# Altium PCB PCB1.PcbDoc
Units mm, origin at the board's own origin, x right, y up, seen from the top; angles counter-clockwise.
Board outline 152.4 x 101.6 mm, 2 copper layers (Top Layer, Bottom Layer); 13 components, 14 nets, 36 pads, 0 vias.
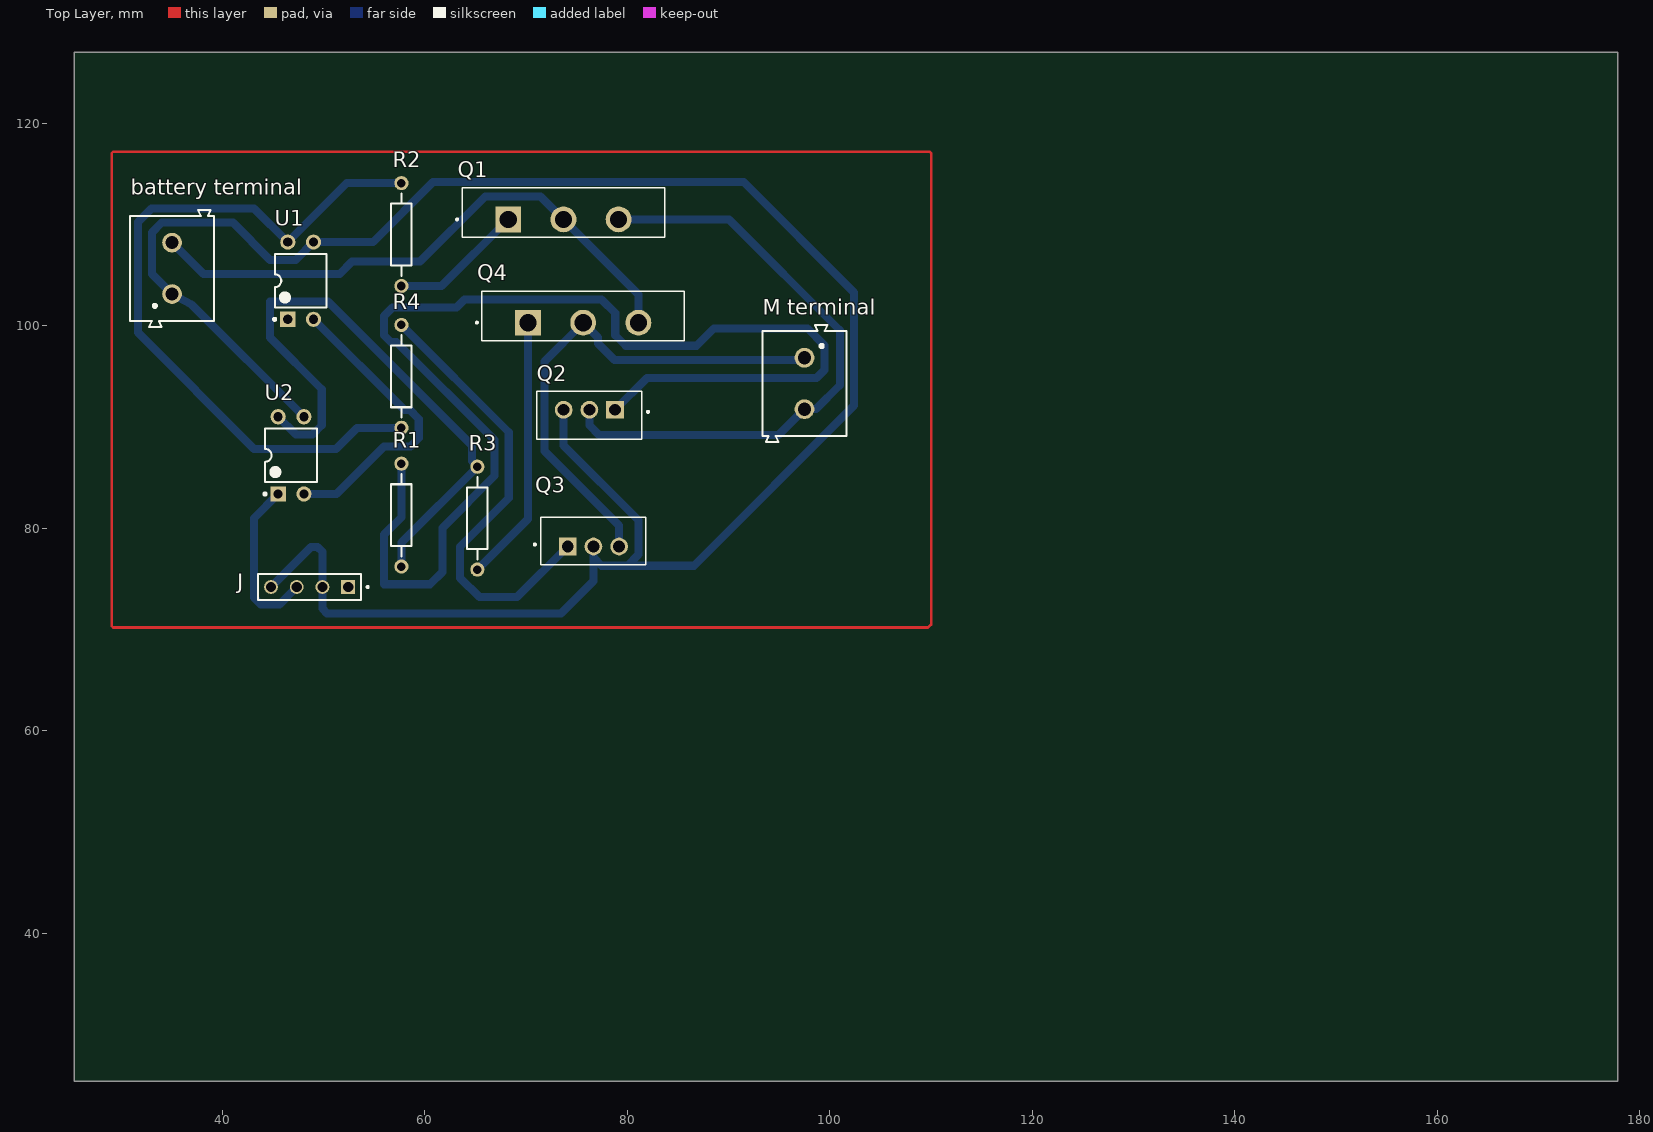
[diagram p0: Top Layer view]
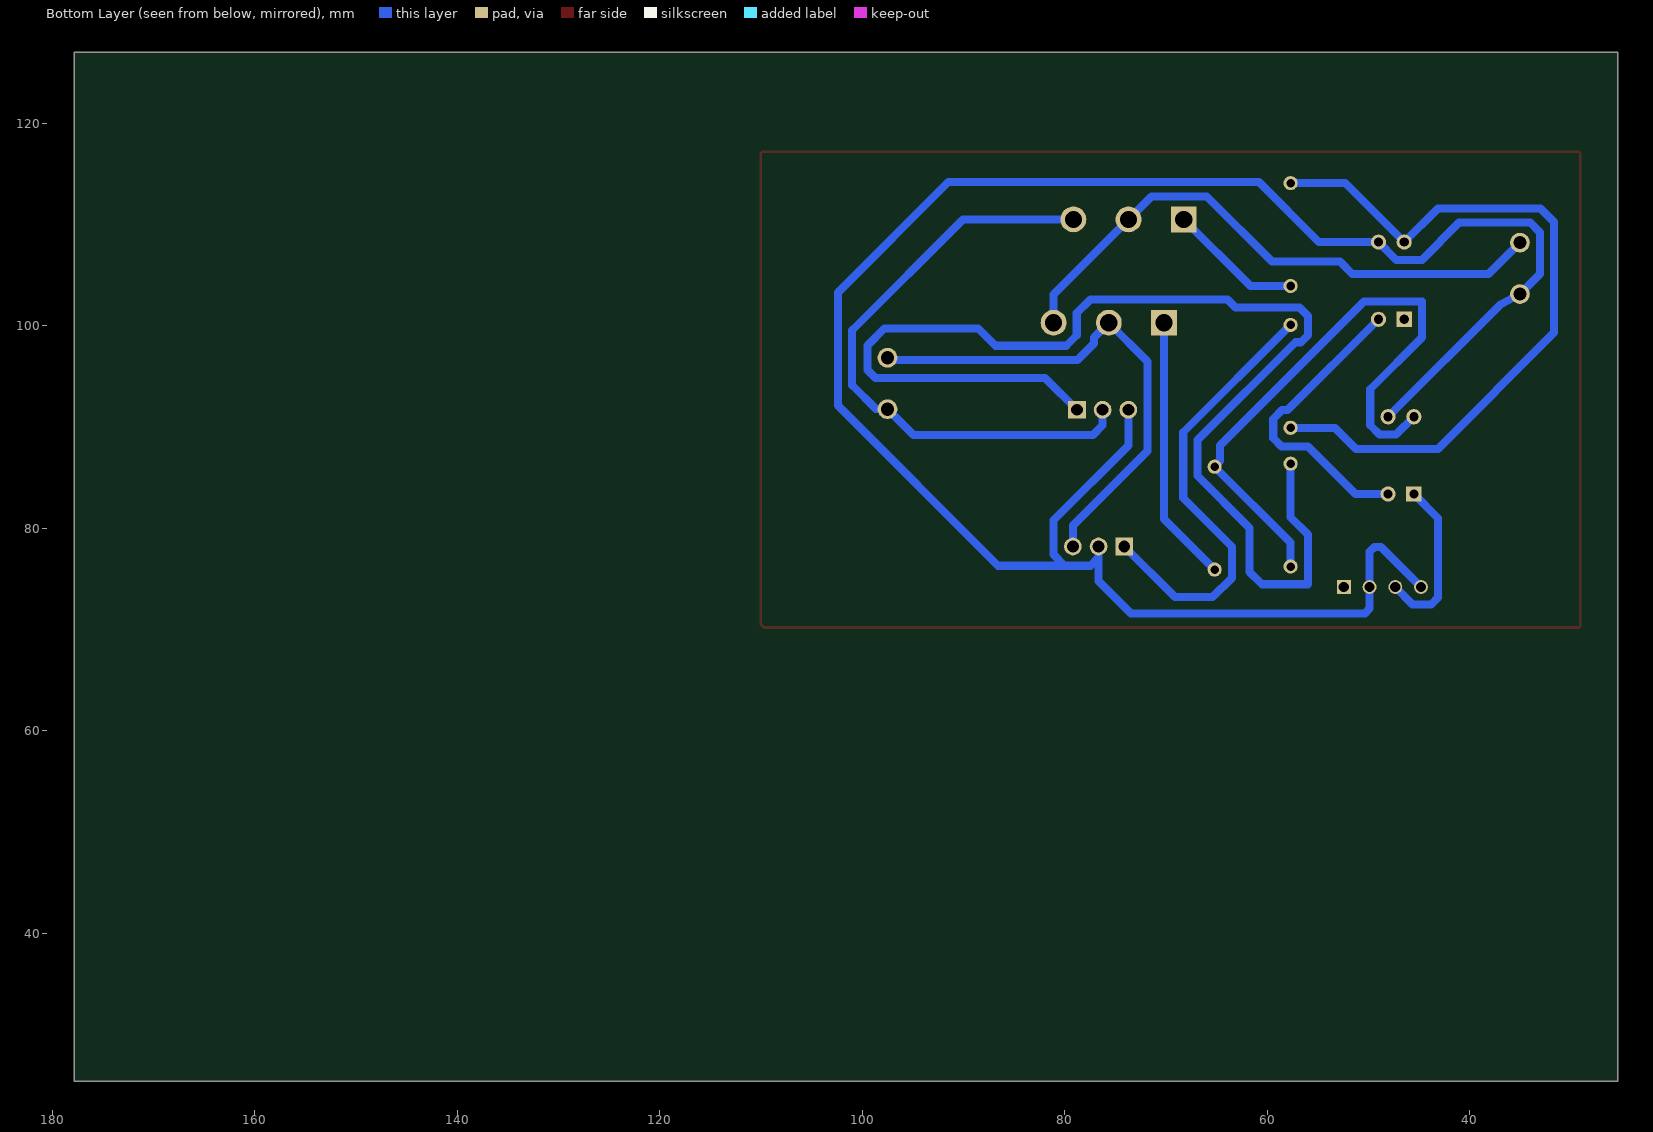
[diagram p1: Bottom Layer view, seen from below]

## Layer stack, top to bottom
Top Solder: solder mask 0.0102, Solder Resist, Dk 3.5
Top Layer: signal copper 0.0356
Dielectric 1: dielectric 0.32, FR-4, Dk 4.8
Bottom Layer: signal copper 0.0356
Bottom Solder: solder mask 0.0102, Solder Resist, Dk 3.5

## Board outline
25.4,25.4 177.8,25.4 177.8,127 25.4,127

## Design rules (kind name [scope] priority, off if disabled: settings)
Clearance [All] p1: gap=0.6 ignorepadtopadclearanceinfootprint=FALSE
PolygonConnect [All] p1: connectstyle=Relief reliefconductorwidth=0.254 reliefentries=4 polygonreliefangle="90 Angle" airgapwidth=0.254
RoutingLayers [All] p1: top layer_v5=FALSE bottom layer_v5=TRUE
RoutingVias [All] p1: holewidth=0.711 width=1.27 viastyle="Through Hole" minholewidth=0.711 minwidth=1.27 maxholewidth=0.711 maxwidth=1.27
SolderMaskExpansion [All] p1: expansion=0.102 istentingtop=FALSE
SupplyNets "Schematic Supply Nets_2" [InNet('+12')] p1: voltage=0.000
SupplyNets "Schematic Supply Nets_1" [InNet('GND')] p2: voltage=0.000
SupplyNets "Schematic Supply Nets" [InNet('mcu GND')] p3: voltage=0.000
Width [All] p1: maxlimit=1 minlimit=0.8 preferedwidth=0.8
29 further rules are at their usual default settings.

## Components (designator, comment, footprint, x,y, rotation, side; value= is the part's Value field where it differs from the comment)
"battery terminal" "6" 691213510002 35.052,105.664 r90 top
J "mcu" SAMTEC_TSW-104-24-G-S 52.44,74.2 r180 top
"M terminal" "691213510002" 691213510002 97.5,94.3 r270 top
Q1 "MOSFET-P" TO545P2000X491X2918-3 73.7,110.5 r0 top
Q2 "MOSFET-N" TO254P1036X470X1965-3 76.26,91.7 r180 top
Q3 "MOSFET-N" TO254P1036X470X1965-3 76.66,78.2 r0 top
Q4 "MOSFET-P" TO545P2000X491X2918-3 75.65,100.3 r0 top
R1 "Res2" AXIAL-0.4 57.7,81.3 r90 top value=1K
R2 "Res2" AXIAL-0.4 57.7,109 r90 top value="1 K"
R3 "Res2" AXIAL-0.4 65.2,81 r90 top value=1K
R4 "Res2" AXIAL-0.4 57.7,95 r270 top value=1K
U1 "Optoisolator1" DIP-4 47.752,104.446 r90 top
U2 "Optoisolator1" DIP-4 46.8,87.2 r90 top

## Footprints (in the part's own frame and the unit in brackets; to place one, negate y for a bottom-side part, rotate by r counter-clockwise, add the part's x,y. Pads: shape width x height; smd on the part's side, far side on the other; paste and mask are expansions set on the pad)
691213510002 [mm]
  round 1.95 hole 1.3: 1(-2.54,0) 2(2.54,0)
  silkscreen extent -5.78,-4.15 5.78,4.15
AXIAL-0.4 [mm] "Axial Device, Thru-Hole; 2 Leads; 0.4 in Pin Spacing"
  round 1.4 hole 0.85: 1(-5.08,0) 2(5.08,0)
  silkscreen extent -4.06,-1.02 4.06,1.02
DIP-4 [mm] "DIP; 4 Leads; Row Spacing 7.62 mm; Pitch 2.54 mm"
  rect 1.5x1.5 hole 0.9: 1(-3.81,1.27)
  round 1.5 hole 0.9: 2(-3.81,-1.27) 3(3.81,-1.27) 4(3.81,1.27)
  silkscreen extent -3.93,-2.55 2.65,2.69, body extent -3.15,-2.5 3.15,2.5, height 5.6
SAMTEC_TSW-104-24-G-S [mm]
  rect 1.37x1.37 hole 1.02: 01(0,0)
  round 1.37 hole 1.02: 02(2.54,0) 03(5.08,0) 04(7.62,0)
  silkscreen extent -2.02,-1.27 8.89,1.27
TO254P1036X470X1965-3 [mm]
  rect 1.755x1.755 / inner round 1.755 / far side rect 1.755x1.755 hole 1.17: 1(-2.54,0)
  round 1.755 hole 1.17: 2(0,0) 3(2.54,0)
  silkscreen extent -5.89,-1.81 5.18,2.89, body extent -5.08,0 5.08,4.55, height 19.65
TO545P2000X491X2918-3 [mm]
  rect 2.55x2.55 hole 1.7: 1(-5.45,0)
  round 2.55 hole 1.7: 2(0,0) 3(5.45,0)
  silkscreen extent -10.6,-1.78 10,3.13

## Part data
"battery terminal": library part 691213510002, "2 Position Wire to Board Terminal Block Horizontal with Board 0.200 (5.08mm) Through Hole", Package=None, Check_prices=https://www.snapeda.com/parts/691213510002/Wurth+Electronics/view-part/?ref=eda, MF="Wurth Electronics", MP=691213510002, SnapEDA_Link=https://www.snapeda.com/parts/691213510002/Wurth+Electronics/view-part/?ref=snap
J: library part TSW-104-24-G-S, "Connector Header Through Hole 4 position 0.100 (2.54mm)", Package=None, Availability=Unavailable, MF=Samtec, MP=TSW-104-24-G-S, Price=None, SnapEDA_Link=https://www.snapeda.com/parts/TSW-104-24-G-S/Samtec/view-part/3451889/?ref=snap
"M terminal": "2 Position Wire to Board Terminal Block Horizontal with Board 0.200 (5.08mm) Through Hole", Package=None, Check_prices=https://www.snapeda.com/parts/691213510002/Wurth+Electronics/view-part/?ref=eda, MF="Wurth Electronics", MP=691213510002, SnapEDA_Link=https://www.snapeda.com/parts/691213510002/Wurth+Electronics/view-part/?ref=snap
Q1 Q4: library part ECW20P20, "P CHANNEL LATERAL MOSFET", Package=None, Availability=Unavailable, MP=ECW20P20, Price=None
Q2 Q3: library part CSD19503KCS, "80-V, N channel NexFETâ„¢ power MOSFET, single TO-220, 9.2 mOhm", Package="TO-220-3 Texas Instruments", Availability="In Stock", Check_prices=https://www.snapeda.com/parts/CSD19503KCS/Texas+Instruments/view-part/?ref=eda, MF="Texas Instruments", MP=CSD19503KCS, Price=None, Purchase-URL=https://pricing.snapeda.com/search/part/CSD19503KCS/?ref=eda, SnapEDA_Link=https://www.snapeda.com/parts/CSD19503KCS/Texas+Instruments/view-part/?ref=snap
R1 R2 R3 R4: "Resistor", LatestRevisionDate=17-Jul-2002, LatestRevisionNote="Re-released for DXP Platform.", PackageDescription="Axial Device, Thru-Hole; 2 Leads; 0.4 in Pin Spacing", PackageReference=AXIAL-0.4, Published=8-Jun-2000, Publisher="Altium Limited"
U1 U2: "4-Pin Phototransistor Optocoupler", DatasheetVersion=Nov-2003, LatestRevisionDate=04-Mar-2005, LatestRevisionNote="Sch pins 3 & 4 Swapped.", PackageReference=DIP-4, Published=24-Mar-1999, Publisher="Altium Limited"

## Nets (pads, with @x,y where several pads share a name; then routed paths per layer and width w, separated by ;. In a path a pad name is that pad's centre, name@x,y a point inside that pad or via, vN(x,y) a via of type N, cw(c..) or ccw(c..) an arc to the next point about the centre after c; other vN are vias at no path point)
1: R2.2 R4.2 U1.4 | length 72.9
  Bottom Layer w0.8: R4.2 53.319,89.92 51.232,87.833 43.155,87.833 31.674,99.314 31.674,110.236 33.02,111.582 43.155,111.582 U1.4 52.306,114.08 R2.2
2: R1.1 R3.2 U2.4 | length 60.8
  Bottom Layer w0.8: U2.4 47.284,89.256 48.92,89.256 49.835,90.17 49.835,93.726 44.729,98.831 44.729,102.387 50.444,102.387 64.652,88.18 64.652,86.628 R3.2 57.7,78.58 R1.1
+12: "battery terminal.2" Q1.2 Q4.3 | length 57.3
  Bottom Layer w0.8: 35.052,108.204 38.151,105.105 51.613,105.105 52.832,106.324 59.524,106.324 65.975,112.775 71.425,112.775 Q1.2 81.1,103.1 Q4.3
GND: "battery terminal.1" J.02 J.04 Q2.3 Q3.2 U1.3 U2.3 | length 210.6
  Bottom Layer w0.8: J.04 48.769,78.149 49.431,78.149 49.9,77.68 49.9,72.069 50.369,71.6 73.457,71.6 76.66,74.803 76.66,77.112 ; U2.3 36.972,102.108 35.052,103.124 33.077,105.099 33.077,109.22 34.036,110.179 41.056,110.179 44.729,106.506 47.272,106.506 U1.3 54.914,108.256 60.834,114.175 91.503,114.175 102.388,103.29 102.388,92.114 86.576,76.302 80.01,76.302 ; Q2.3 73.72,88.18 81.102,80.798 81.102,77.394 80.01,76.302 ; Q3.2 76.66,77.112 ; 76.66,77.112 77.47,76.302 80.01,76.302
mcu1: J.01
"mcu 1": U1.1
"mcu 2": J.03 U2.1 | length 16.4
  Bottom Layer w0.8: U2.1 43.129,80.989 43.129,73.177 43.815,72.492 45.652,72.492 J.03
"mcu GND": U1.2 U2.2 | length 30
  Bottom Layer w0.8: U2.2 51.284,83.39 55.982,88.087 58.598,88.087 59.411,88.9 59.411,90.805 58.547,91.669 57.989,91.669 U1.2
"NetM terminal_1": "M terminal.1" Q3.3 Q4.2 | length 50.5
  Bottom Layer w0.8: Q3.3 79.2,80.261 71.831,87.63 71.831,96.481 Q4.2 77.128,98.822 77.128,98.237 78.74,96.625 97.285,96.625 97.5,96.84
"NetM terminal_2": "M terminal.2" Q1.3 Q2.2 | length 60.5
  Bottom Layer w0.8: Q2.2 76.26,90.17 77.225,89.205 94.945,89.205 97.5,91.76 98.625,91.76 100.988,94.123 100.988,99.557 90.045,110.5 Q1.3
NetQ1_1: Q1.1 R2.1 | length 13.3
  Bottom Layer w0.8: R2.1 61.67,103.92 Q1.1
NetQ2_1: Q2.1 R1.2 | length 124.7
  Bottom Layer w0.8: R1.2 57.7,81.093 55.982,79.375 55.982,74.473 60.528,74.473 61.747,75.692 61.747,80.035 66.9,85.188 66.9,88.699 57.225,98.374 56.667,98.374 55.982,99.06 55.982,100.965 56.82,101.803 63.144,101.803 63.932,102.591 77.47,102.591 78.816,101.244 78.816,99.06 79.851,98.025 86.849,98.025 88.57,99.746 97.79,99.746 99.492,98.044 99.492,95.631 98.704,94.844 81.944,94.844 Q2.1
NetQ3_1: Q3.1 R4.1 | length 44.8
  Bottom Layer w0.8: R4.1 68.3,89.48 68.3,82.98 63.5,78.18 63.5,75.108 65.408,73.2 69.12,73.2 Q3.1
NetQ4_1: Q4.1 R3.1 | length 26.5
  Bottom Layer w0.8: R3.1 70.2,80.92 Q4.1
copper on no net: | length 255.4
  Top Layer w0.254: 29.1,70.349 29.1,117.051 29.249,117.2 109.7,117.2 109.851,117.2 110,117.051 110,70.5 109.7,70.2 29.249,70.2 29.1,70.349